# Altium PCB pcb_v1-HSM213-001-SPC.PcbDoc
Units mil, origin at the board's own origin, x right, y up, seen from the top; angles counter-clockwise.
Board outline 4020 x 2120 mil, 2 copper layers (Top Layer, Bottom Layer); 27 components, 27 nets, 117 pads, 9 vias.
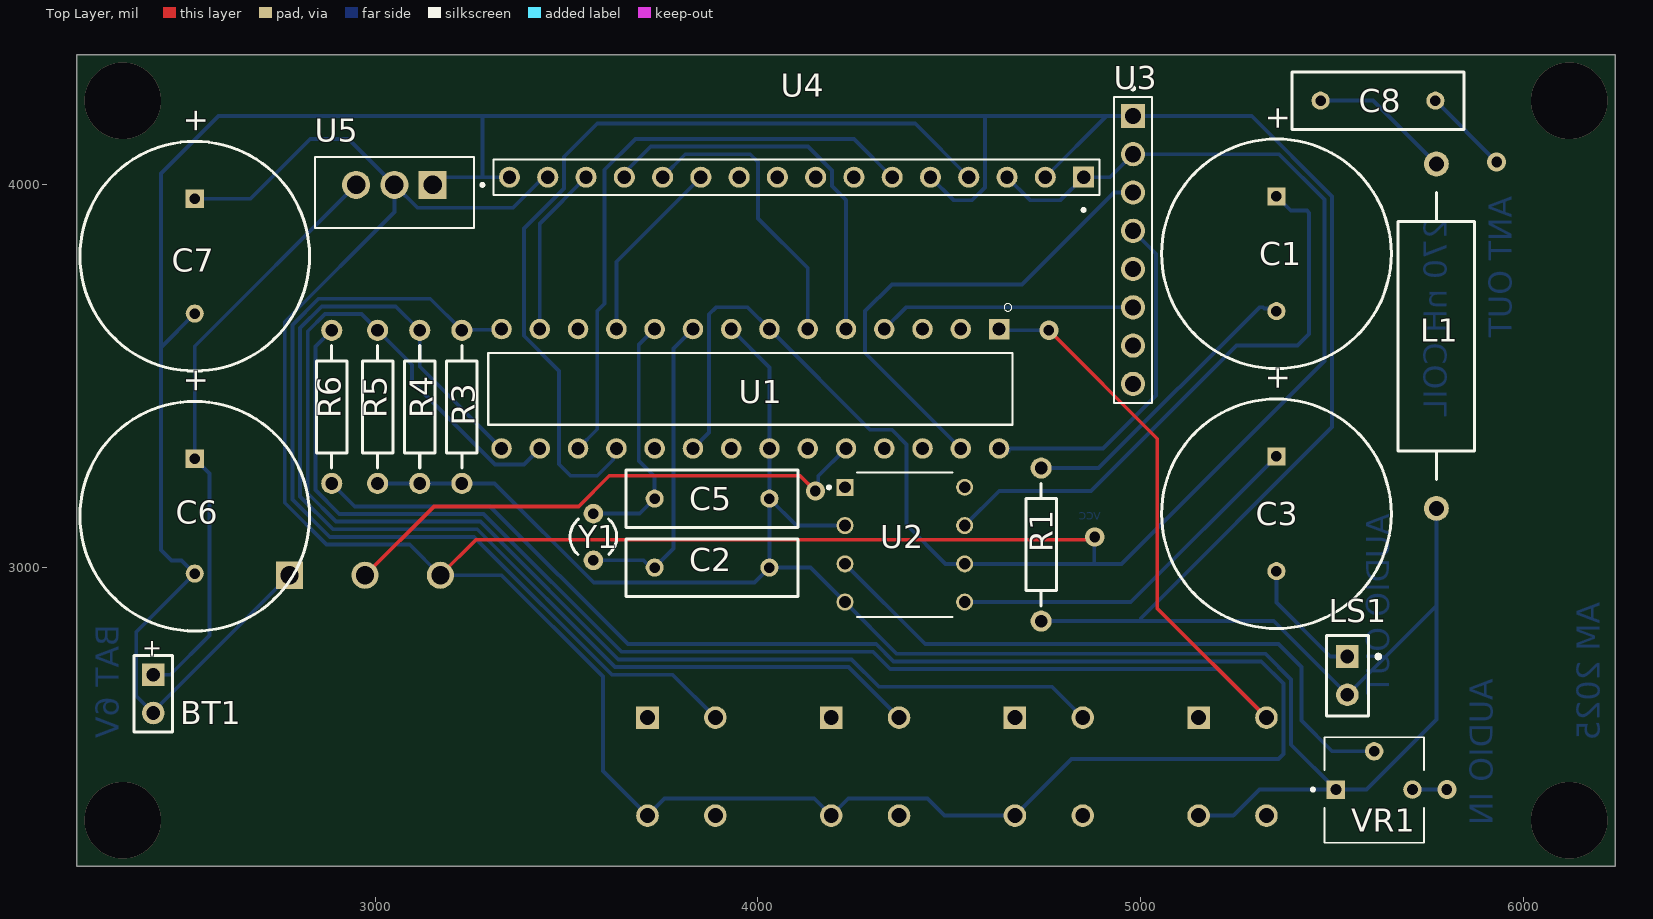
[diagram p0: Top Layer view]
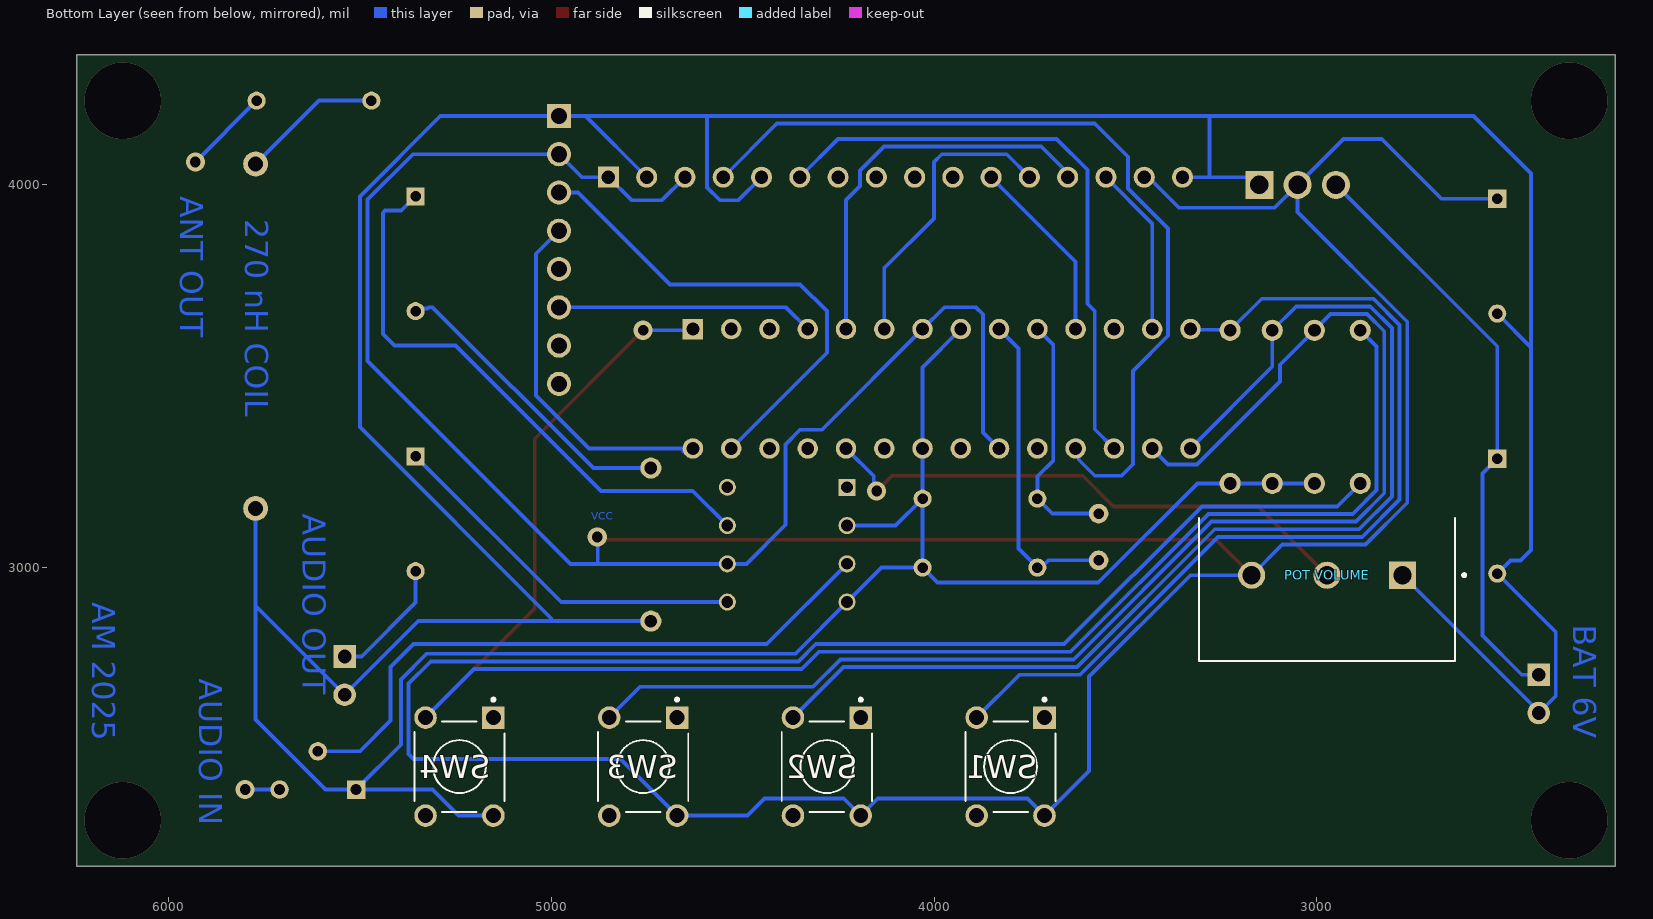
[diagram p1: Bottom Layer view, seen from below]
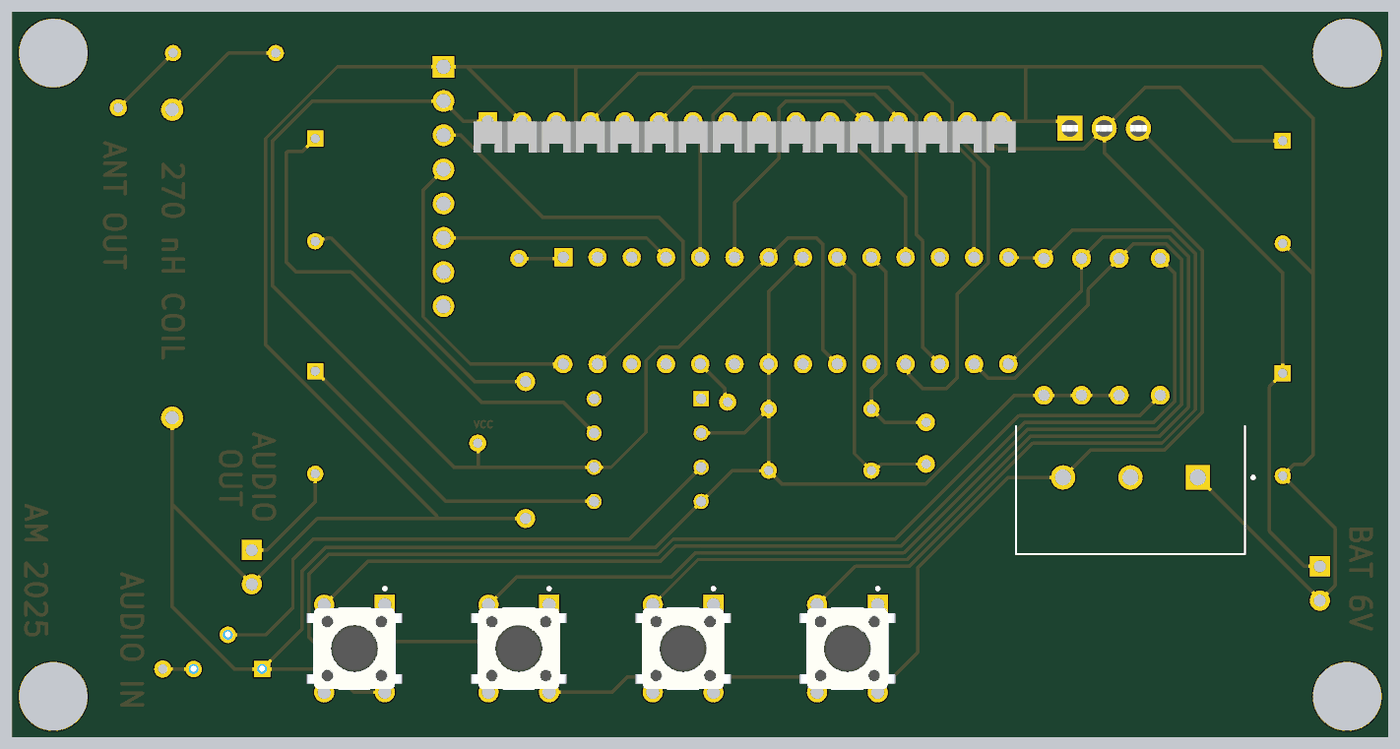
[diagram p2: 3D render of the assembled board from below, using the file's embedded part models]

## Layer stack, top to bottom
Top Solder: solder mask 0.4, Solder Resist, Dk 3.5
Top Layer: signal copper 1.4
Dielectric 1: dielectric 12.6, FR-4, Dk 4.8
Bottom Layer: signal copper 1.4
Bottom Solder: solder mask 0.4, Solder Resist, Dk 3.5

## Board outline
2220,2220 6240,2220 6240,4340 2220,4340

## Design rules (kind name [scope] priority, off if disabled: settings)
Clearance [All] p1: gap=10 ignorepadtopadclearanceinfootprint=FALSE
HoleSize [All] p1: absolutevalues=TRUE maxlimit=200 minlimit=1 maxpercent=80.000 minpercent=20.000
PolygonConnect [All] p1: connectstyle=Relief reliefconductorwidth=10 reliefentries=4 polygonreliefangle="90 Angle" airgapwidth=10
RoomDefinition Piirikaavio [InComponentClass('Piirikaavio')] p1: confinementstyle=ConfineIn formatcopy=TRUE lockcomponents=FALSE outline 2210,2220 6240,2220 6240,4340 2210,4340
RoutingVias [All] p1: holewidth=28 width=50 viastyle="Through Hole" minholewidth=28 minwidth=50 maxholewidth=28 maxwidth=50
SolderMaskExpansion [All] p1: expansion=4 istentingtop=FALSE
Width [All] p1: maxlimit=10 minlimit=10 preferedwidth=10
29 further rules are at their usual default settings.

## Components (designator, comment, footprint, x,y, rotation, side; value= is the part's Value field where it differs from the comment)
BT1 "Battery 6V" BAT-2 2420,2670 r270 top
C1 "Cap Pol1" RB7.6-15 5354.77,3820 r90 top value=0.1µF
C2 "Cap" RAD-0.3 3880,3000 r180 top value=22pF
C3 "Cap Pol1" RB7.6-15 5354.77,3140.64 r90 top value=1000µF
C5 "Cap" RAD-0.3 3880,3180 r180 top value=22pF
C6 "Cap Pol1" RB7.6-15 2528.37,3134.34 r90 top value=10µF
C7 "Cap Pol1" RB7.6-15 2528.37,3813.7 r90 top value=10µF
C8 "Cap" RAD-0.3 5620,4220 r180 top value=100pF
L1 "Inductor Iron" AXIAL-0.9 5772.66,3604.57 r270 top value="270 nH"
LS1 "Speaker" PIN2 5540,2767.63 r270 top
"POT VOLUME" "PTN16-A20120K1B1" POT_PTN16-A20120K1B1 2776.3,2980 r0 bottom
R1 "Res2" AXIAL-0.4 4740,3060 r90 top value=10
R3 "Res2" AXIAL-0.4 3226.25,3420 r270 top value=10k
R4 "Res2" AXIAL-0.4 3116.25,3420 r270 top value=10k
R5 "Res2" AXIAL-0.4 3006.25,3420 r270 top value=10k
R6 "Res2" AXIAL-0.4 2886.25,3420 r270 top value=10k
SW1 "1825910-6" SW_1825910-6-4 3800,2480 r270 bottom
SW2 "1825910-6" SW_1825910-6-4 4280,2480 r270 bottom
SW3 "1825910-6" SW_1825910-6-4 4760,2480 r270 bottom
SW4 "1825910-6" SW_1825910-6-4 5240,2480 r270 bottom
U1 "ATMEGA328P-PU" DIP794W46P254L2967H457Q28B 3980,3467.2 r270 top
U2 "LM386N-4/NOPB" DIP794W45P254L959H508Q8 4383.7,3059.75 r0 top
U3 "SI4703 Evaluation board" HARWIN_M20-9730846 4980,3830 r270 top
U4 "16x2 LCD-display" TE_6-146276-6 4100.76,4020 r180 top
U5 "LM1117T-3.3/NOPB" TO254P1054X470X1955-3 3050,4000 r180 top
VR1 "3362P-1-252LF" TRIM_3362P-1-252LF 5610,2420 r0 top
Y1 "8 MHz" R38 3570,3080 r180 top

## Footprints (in the part's own frame and the unit in brackets; to place one, negate y for a bottom-side part, rotate by r counter-clockwise, add the part's x,y. Pads: shape width x height; smd on the part's side, far side on the other; paste and mask are expansions set on the pad)
AXIAL-0.4 [mm] "Axial Device, Thru-Hole; 2 Leads; 0.4 in Pin Spacing"
  round 1.4 hole 0.85: 1(-5.08,0) 2(5.08,0)
  silkscreen extent -4.06,-1.02 4.06,1.02
AXIAL-0.9 [mm] "Axial Device, Thru-Hole; 2 Leads; 0.9 in Pin Spacing"
  round 1.65 hole 1: 1(-11.43,0) 2(11.43,0)
  silkscreen extent -9.53,-2.54 9.53,2.54
BAT-2 [mm] "Battery; 2 Leads"
  rect 1.5x1.5 hole 0.9: 1(-1.27,0)
  round 1.5 hole 0.9: 2(1.27,0)
  silkscreen extent -2.54,-1.27 2.54,1.27
DIP794W45P254L959H508Q8 [mm]
  rect 1.13x1.13 hole 0.78: 1(-3.97,3.81)
  round 1.13 hole 0.78: 2(-3.97,1.27) 3(-3.97,-1.27) 4(-3.97,-3.81) 5(3.97,-3.81) 6(3.97,-1.27) 7(3.97,1.27) 8(3.97,3.81)
  silkscreen extent -5.13,-4.79 3.17,4.79
DIP794W46P254L2967H457Q28B [mm]
  rect 1.358x1.358 hole 0.85: 1(-3.96,16.51)
  round 1.358 hole 0.85: 2(-3.96,13.97) 3(-3.96,11.43) 4(-3.96,8.89) 5(-3.96,6.35) 6(-3.96,3.81) 7(-3.96,1.27) 8(-3.96,-1.27) 9(-3.96,-3.81) 10(-3.96,-6.35) 11(-3.96,-8.89) 12(-3.96,-11.43) 13(-3.96,-13.97) 14(-3.96,-16.51) 15(3.96,-16.51) 16(3.96,-13.97) 17(3.96,-11.43) 18(3.96,-8.89) 19(3.96,-6.35) 20(3.96,-3.81) 21(3.96,-1.27) 22(3.96,1.27) 23(3.96,3.81) 24(3.96,6.35) 25(3.96,8.89) 26(3.96,11.43) 27(3.96,13.97) 28(3.96,16.51)
  silkscreen extent -5.65,-17.4 2.38,17.4
HARWIN_M20-9730846 [mm]
  rect 1.605x1.605 / inner round 1.605 / far side rect 1.605x1.605 hole 1.07: 1(-8.89,0)
  round 1.605 hole 1.07: 2(-6.35,0) 3(-3.81,0) 4(-1.27,0) 5(1.27,0) 6(3.81,0) 7(6.35,0) 8(8.89,0)
  silkscreen extent -10.82,-1.27 10.16,1.27
PIN2 [mm] "Photosensitive Diode; 2 Leads"
  rect 1.5x1.5 hole 0.9: 1(0,0)
  round 1.5 hole 0.9: 2(2.54,0)
  silkscreen extent -1.4,-1.4 3.94,2.18
POT_PTN16-A20120K1B1 [mm]
  rect 1.8x1.8 / inner round 1.8 / far side rect 1.8x1.8 hole 1.2: 1(0,0)
  round 1.8 hole 1.2: 2(5,0) 3(10,0)
  silkscreen extent -4.2,-3.81 13.5,5.69
R38 [mm] "Crystal, Thru-Hole; 2 Leads; Body 3.1 x 8.2 mm (Dia.xH)"
  round 1.3 hole 0.7: 1(0,1.55) 2(0,-1.55)
  silkscreen extent -1.55,-1.19 1.55,1.17
RAD-0.3 [mm] "Radial Cap, Thru-Hole; 2 Leads; 0.3 in Pin Spacing"
  round 1.2 hole 0.7: 1(-3.81,0) 2(3.81,0)
  silkscreen extent -5.71,-1.91 5.71,1.91
RB7.6-15 [mm] "Polarized Capacitor (Radial); 2 Leads"
  rect 1.2x1.2 hole 0.7: 1(3.81,0)
  round 1.2 hole 0.7: 2(-3.81,0)
  silkscreen extent -7.62,-7.62 7.62,7.62
SW_1825910-6-4 [mm]
  rect 1.498x1.498 / inner round 1.498 / far side rect 1.498x1.498 hole 0.99: 1(-3.25,2.25)
  round 1.498 hole 0.99: 2(3.25,2.25) 3(-3.25,-2.25) 4(3.25,-2.25)
  silkscreen extent -4.54,-3 3,3, body extent -3,-3.9 3,3.9, height 5.01
TE_6-146276-6 [mm]
  rect 1.398x1.398 hole 0.89: 1(-19.05,0)
  round 1.398 hole 0.89: 2(-16.51,0) 3(-13.97,0) 4(-11.43,0) 5(-8.89,0) 6(-6.35,0) 7(-3.81,0) 8(-1.27,0) 9(1.27,0) 10(3.81,0) 11(6.35,0) 12(8.89,0) 13(11.43,0) 14(13.97,0) 15(16.51,0) 16(19.05,0)
  silkscreen extent -20.12,-1.17 20.12,2.27, body extent -20.12,-8.08 20.12,5.46, height 1.17
TO254P1054X470X1955-3 [mm]
  rect 1.86x1.86 / inner round 1.86 / far side rect 1.86x1.86 hole 1.24: 1(-2.54,0)
  round 1.86 hole 1.24: 2(0,0) 3(2.54,0)
  silkscreen extent -5.94,-1.84 5.27,2.86, body extent -5.08,-1.49 5.08,2.71, height 22.86
TRIM_3362P-1-252LF [mil]
  rect 48.11x48.11 hole 28.11: 1(-100,0)
  round 48.11 hole 28.11: 2(0,100) 3(100,0)
  silkscreen extent -164,-139 130,137, body extent -130,-138 130,138, height 192

## Part data
BT1: library part Battery, "Multicell Battery", LatestRevisionDate=17-Jul-2002, LatestRevisionNote="Re-released for DXP Platform.", PackageDescription="Battery; 2 Leads", PackageReference=BAT-2, Published=24-Mar-1999, Publisher="Altium Limited"
C1 C3 C6 C7: "Polarized Capacitor (Radial)", LatestRevisionDate=17-Jul-2002, LatestRevisionNote="Re-released for DXP Platform.", PackageDescription="Polarized Capacitor (Radial); 2 Leads", PackageReference=RB7.6-15, Published=8-Jun-2000, Publisher="Altium Limited"
C2 C5 C8: "Capacitor", LatestRevisionDate=17-Jul-2002, LatestRevisionNote="Re-released for DXP Platform.", PackageDescription="Radial Cap, Thru-Hole; 2 Leads; 0.3 in Pin Spacing", PackageReference=RAD-0.3, Published=8-Jun-2000, Publisher="Altium Limited"
L1: "Magnetic-Core Inductor", LatestRevisionDate=17-Jul-2002, LatestRevisionNote="Re-released for DXP Platform.", PackageDescription="Axial Device, Thru-Hole; 2 Leads; 0.9 in Pin Spacing", PackageReference=AXIAL-0.9, Published=24-Mar-1999, Publisher="Altium Limited"
LS1: "Loudspeaker", LatestRevisionDate=17-Jul-2002, LatestRevisionNote="Re-released for DXP Platform.", PackageReference=PIN2, Published=24-Mar-1999, Publisher="Altium Limited"
"POT VOLUME": "16.5 mm, Horizontal, Linear, 20 kÎ©, Through Hole, Knurled Shaft Single Section Rotary Potentiometer", Package=None, Check_prices=https://www.snapeda.com/parts/PTN16-A20120K1B1/CUI+Devices/view-part/?ref=eda, CUI_purchase_URL=https://www.cuidevices.com/product/motion-and-control/potentiometers/rotary-potentiometers/ptn16-a20120k1b1?utm_source=snapeda.com&utm_medium=referral&utm_campaign=snapedaBOM, MF="CUI Devices", MP=PTN16-A20120K1B1, SnapEDA_Link=https://www.snapeda.com/parts/PTN16-A20120K1B1/CUI+Devices/view-part/?ref=snap
R1 R3 R4 R5 R6: "Resistor", LatestRevisionDate=17-Jul-2002, LatestRevisionNote="Re-released for DXP Platform.", PackageDescription="Axial Device, Thru-Hole; 2 Leads; 0.4 in Pin Spacing", PackageReference=AXIAL-0.4, Published=8-Jun-2000, Publisher="Altium Limited"
SW1 SW2 SW3 SW4: "Switch Push Button OFF (ON) SPST Round Button 0.05A 24VDC Momentary Contact PC Pins Thru-Hole", Package=None, Check_prices=https://www.snapeda.com/parts/1825910-6/TE+Connectivity+ALCOSWITCH+Switches/view-part/?ref=eda, Digi-Key_Part_Number=450-1650-ND, MF="TE Connectivity", MP=1825910-6, Purchase-URL=https://pricing.snapeda.com/search/part/1825910-6/?ref=eda, SnapEDA_Link=https://www.snapeda.com/parts/1825910-6/TE+Connectivity+ALCOSWITCH+Switches/view-part/?ref=snap
U1: "ATmega Series 20 MHz 32 KB Flash 2 KB SRAM 8-Bit Microcontroller - DIP-28", Package=None, Availability=Unavailable, MP=ATMEGA328P-PU, Price=None
U2: Package=None, Availability=Unavailable, MP=LM386N-4/NOPB, Price=None
U3: library part M20-9730846, Package=None, Availability=Unavailable, MF=Harwin, MP=M20-9730846, Price=None
U4: library part 6-146276-6, "16 MODII HDR SRST B/A .100CL", Package=None, Availability=Warning, Centerline_Pitch="2.54 mm[.1 in]", Check_prices=https://www.snapeda.com/parts/6-146276-6/TE%20Connectivity/view-part/1438677/?ref=eda, EU_RoHS_Compliance=Compliant, MF="TE Connectivity", MP=6-146276-6, Number_of_Positions=16, Price=None, Product_Type=Connector, Purchase-URL=https://pricing.snapeda.com/search/part/6-146276-6/?ref=eda, SnapEDA_Link=https://www.snapeda.com/parts/6-146276-6/TE%20Connectivity/view-part/1438677/?ref=snap
U5: "800-mA 15-V linear voltage regulator", Package="TO-220-3 Texas Instruments", Availability="In Stock", Check_prices=https://www.snapeda.com/parts/LM1117T-3.3/NOPB/Texas+Instruments/view-part/?ref=eda, MF="Texas Instruments", MP=LM1117T-3.3/NOPB, Price=None, Purchase-URL=https://pricing.snapeda.com/search/part/LM1117T-3.3/NOPB/?ref=eda, SnapEDA_Link=https://www.snapeda.com/parts/LM1117T-3.3/NOPB/Texas+Instruments/view-part/?ref=snap
VR1: "2.5 kOhms 0.5W, 1/2W PC Pins Through Hole Trimmer Potentiometer Cermet 1 Turn Top Adjustment", Package="3362P-1 Bourns Inc.", Availability=Warning, Check_prices=https://www.snapeda.com/parts/3362P-1-252LF/Bourns/view-part/1439689/?ref=eda, MF=Bourns, MP=3362P-1-252LF, Price=None, Purchase-URL=https://pricing.snapeda.com/search/part/3362P-1-252LF/?ref=eda, SnapEDA_Link=https://www.snapeda.com/parts/3362P-1-252LF/Bourns/view-part/1439689/?ref=snap
Y1: library part XTAL, "Crystal Oscillator", LatestRevisionDate=17-Jul-2002, LatestRevisionNote="Re-released for DXP Platform.", PackageDescription="Crystal, Thru-Hole; 2 Leads; Body 3.1 x 8.2 mm (Dia.xH)", PackageReference=R38, Published=8-Jun-2000, Publisher="Altium Limited"

## Via types
v1: diameter 50, hole 28, Top Layer to Bottom Layer, 5 vias
v2: diameter 200, hole 200, Top Layer to Bottom Layer, 4 vias

## Nets (pads, with @x,y where several pads share a name; then routed paths per layer and width w, separated by ;. In a path a pad name is that pad's centre, name@x,y a point inside that pad or via, vN(x,y) a via of type N, cw(c..) or ccw(c..) an arc to the next point about the centre after c; other vN are vias at no path point)
A1: "POT VOLUME.2" U1.24 | length 1448.7
  Top Layer w10: 2973.15,2976.85 2973.15,2980 3153.15,3160 3531.57,3160 3611.57,3240 4110,3240 v1(4150,3200)
  Bottom Layer w10: v1(4150,3200) 4157.65,3207.65 4157.65,3238.95 U1.24
ANTENNA: C8.1 | length 226.3
  Bottom Layer w10: C8.1 v1(5930,4060)
AUDIO: VR1.3 | length 90
  Bottom Layer w10: VR1.3 v1(5800,2420)
BTN1: R3.1 SW1.3 U1.14 | length 2407.6
  Bottom Layer w10: U1.14 3328.44,3621.56 3227.8,3621.56 R3.1 3143.69,3702.56 2852.05,3702.56 2783.69,3634.2 2783.69,3177.52 2881.21,3080 3258.28,3080 3618.28,2720 3776.54,2720 SW1.3
BTN2: R4.1 SW2.3 U1.15 | length 3003.5
  Bottom Layer w10: U1.15 3116.25,3525.05 R4.1 3053.69,3682.56 2860.34,3682.56 2803.69,3625.91 2803.69,3185.8 2889.49,3100 3266.57,3100 3626.57,2740 4236.54,2740 SW2.3
BTN3: R5.1 SW3.3 U1.16 | length 3522
  Bottom Layer w10: U1.16 3388.27,3269.57 3312.71,3269.57 3096.25,3486.03 3096.25,3530 R5.1 2963.69,3662.56 2868.62,3662.56 2823.69,3617.63 2823.69,3194.09 2897.78,3120 3274.85,3120 3634.85,2760 4244.82,2760 4316.16,2688.66 4767.87,2688.66 SW3.3
BTN4: R6.1 SW4.3 U1.1 | length 4545.2
  Top Layer w10: v1(4760,3620) 5043.43,3336.57 5043.43,2893.1 SW4.3
  Bottom Layer w10: R6.1 2843.69,3577.44 2843.69,3202.37 2906.06,3140 3283.14,3140 3643.14,2780 4300.59,2780 4345.65,2734.94 5201.6,2734.94 SW4.3 ; U1.1 4633.11,3620 v1(4760,3620)
D4: U1.11 U4.11 | length 488.3
  Bottom Layer w10: U1.11 3630,3799.24 U4.11
D5: U1.6 U4.12 | length 773.6
  Bottom Layer w10: U4.12 3750.76,4020.76 3810,4080 3980,4080 4000,4060 4000,3912.44 4130,3782.44 U1.6
D6: U1.5 U4.13 | length 1037.5
  Bottom Layer w10: U4.13 3650.76,4030.76 3720,4100 4130.89,4100 4193.28,4037.61 4193.28,3996.72 4230,3960 U1.5
D7: U1.13 U4.14 | length 446.9
  Bottom Layer w10: U1.13 3430,3899.24 U4.14
E: U1.17 U4.6 | length 1583
  Bottom Layer w10: U1.17 3580,3361.3 3580,3670 3599.3,3689.3 3599.3,4039.3 3680,4120 4250.76,4120 U4.6
GND: "POT VOLUME.1" BT1.2 C2.1 C5.1 C6.2 C7.2 L1.2 LS1.2 R1.1 R3.2 R4.2 R5.2 SW4.2 U1.8 U1.22 U2.2 U2.4 U3.1 U4.2 U4.5 U4.16 U5.1 VR1.1 | length 14012.8
  Bottom Layer w10: C7.2 2440,3575.34 ; 2776.3,2980 2420,2623.7 BT1.2 2375.47,2664.53 2375.47,2831.45 C6.2 2494.04,3018.66 2467.2,3018.66 2440,3045.86 2440,3575.34 ; R5.2 R4.2 R3.2 3311.57,3220 3570.79,2960.79 3990.79,2960.79 C2.1 ; U5.1 3170,4020 3280,4020 ; U4.16 3280,4020 ; U1.8 4030,3523.11 U1.22 C5.1 ; U2.2 4100.25,3109.75 C5.1 ; U4.5@4450,4020.76 U4.5 4510.76,3960 4560,3960 4593.28,3993.28 4593.28,4176.72 4590,4180 ; R1.1 5000,2860 ; U4.2 4910.76,4180 ; SW4.2 5242.05,2352.05 5310,2420 VR1.1 ; L1.2 5772.66,2900.29 ; 2440,3575.34 2440,4030 2590,4180 3280,4180 ; 3280,4020 3280,4180 ; 3280,4180 4590,4180 ; C2.1 4137.16,3000 U2.4 4362.22,2774.94 5325.69,2774.94 5393.07,2707.55 5393.07,2536.93 VR1.1 ; C2.1 C5.1 ; 4590,4180 4910.76,4180 ; 4910.76,4180 U3.1 5290,4180 5500,3970 5500,3367.41 5000,2867.41 5000,2860 ; 5000,2860 5347.63,2860 LS1.2 5772.66,2900.29 ; VR1.1 5590,2420 5772.66,2602.66 5772.66,2900.29
NetBT1_1: BT1.1 C6.1 U5.3 | length 1557.6
  Bottom Layer w10: BT1.1 2464.53,2720 2566.99,2822.46 2566.99,3245.72 C6.1 2528.37,3578.37 U5.3
NetC1_1: C1.1 U2.7 | length 1527.2
  Bottom Layer w10: U2.7 4630.25,3200 4870,3200 5250,3580 5410,3580 5440,3610 5440,3926.9 5434.14,3932.76 5392.01,3932.76 C1.1
NetC1_2: C1.2 R1.2 | length 793.3
  Bottom Layer w10: R1.2 4890,3260 5310,3680 5320,3680 5322.87,3677.13 5347.65,3677.13 C1.2 C1.2@5355.09,3669.68
NetC2_2: C2.2 U1.9 Y1.1 | length 832.4
  Bottom Layer w10: Y1.1 3700.95,3018.98 3719.92,3000 C2.2 3779.41,3049.41 3779.41,3572.52 U1.9
NetC3_1: C3.1 U2.5 | length 972.5
  Bottom Layer w10: U2.5 4973.89,2909.75 C3.1
NetC3_2: C3.2 LS1.1 | length 325.8
  Bottom Layer w10: C3.2 5354.77,2908.33 5495.47,2767.63 LS1.1
NetC5_2: C5.2 U1.10 Y1.2 | length 653.8
  Bottom Layer w10: Y1.2 3691.02,3141.02 C5.2 3730,3238.47 3688.27,3280.2 3688.27,3581.38 U1.10
NetC8_2: C8.2 L1.1 | length 371.2
  Bottom Layer w10: C8.2 5607.23,4220 L1.1
NetU2_3: U2.3 VR1.2 | length 1667.5
  Bottom Layer w10: U2.3 4437.16,2800 5360,2800 5420,2740 5420,2600 5500,2520 VR1.2
RS: U1.18 U4.4 | length 2240.6
  Bottom Layer w10: U1.18 3621.68,3302.98 3621.68,3281.68 3580,3240 3510,3240 3480,3270 3480,3514.09 3388.27,3605.82 3388.27,3885.79 3493.28,3990.8 3493.28,4073.28 3580,4160 4410.76,4160 U4.4
RST: U1.4 U3.6 | length 673.6
  Bottom Layer w10: U1.4 4386.89,3680 U3.6
SCL: U1.28 U3.4 | length 950.4
  Bottom Layer w10: U1.28@4654.61,3302.98 4638.32,3302.98 U1.28 4901.3,3311.3 5040,3450 5040,3820 U3.4
SDA: U1.27 U3.3 | length 1290.7
  Bottom Layer w10: U1.27 4280,3561.3 4280,3670 4350,3740 4690,3740 4930,3980 U3.3
VCC: "POT VOLUME.3" C7.1 R6.2 SW1.2 SW2.2 SW3.2 U1.7 U1.20 U2.6 U3.2 U4.1 U4.3 U4.15 U5.2 | length 13965.6
  Top Layer w10: 3170,2980 3262.51,3072.51 4872.51,3072.51 v1(4880,3080)
  Bottom Layer w10: C7.1 2673.7,3963.7 2830,4120 2930,4120 U5.2 ; R6.2 2946.25,3160 3300,3160 3660,2800 4308.87,2800 4353.93,2754.94 5315.06,2754.94 5373.07,2696.93 5373.07,2513.07 5360,2500 4819.37,2500 SW3.2 4487.62,2352.05 4443.13,2396.54 4235.91,2396.54 SW2.2 4146.93,2396.54 3755.91,2396.54 SW1.2 3595,2468.46 3595,2715 3330,2980 3170,2980 3090,3060 2872.93,3060 2763.69,3169.23 2763.69,3642.48 3050,3928.79 U5.2 ; U4.15@3450.76,4020.76 U4.15 3440,4020 3360,3940 3110,3940 U5.2 ; U1.20 3871.73,3353.03 3871.73,3661.73 3890,3680 3973.11,3680 U1.7 4293.11,3360 4350,3360 4388.27,3321.73 4388.27,3111.73 4490.25,3009.75 U2.6 4878.59,3009.75 ; U4.3 4710.76,3960 4790.76,3960 U4.1 4920,4020 U3.2 5361.72,4080 5480,3961.72 5480,3540 4949.75,3009.75 4878.59,3009.75 ; v1(4880,3080) 4878.59,3078.59 4878.59,3009.75
pads on no net: SW1.1 SW1.4 SW2.1 SW2.4 SW3.1 SW3.4 SW4.1 SW4.4 U1.2 U1.3 U1.12 U1.19 U1.21 U1.23 U1.25 U1.26 U2.1 U2.8 U3.5 U3.7 U3.8 U4.7 U4.8 U4.9 U4.10
copper on no net:
  other v2: 2340,2340 6120,2340 2340,4220 6120,4220

## Other copper
Bottom Layer:
  text "ANT OUT" at 5970,3970 h60 r90
  text "270 nH COIL" at 5800,3910 h60 r90
  text "AUDIO OUT" at 5650,3140 h60 r90
  text "VCC" at 4895,3125 h20
  text "AM 2025" at 6200,2910 h60 r90
  text "BAT 6V" at 2330,2850 h60 r90
  text "AUDIO IN" at 5920,2709.86 h60 r90

## Text inside footprints (layer, text, board x,y; h text height)
BT1: Top Overlay "+" at 2397.28,2814.49 h45.28 r270
C1: Top Overlay "+" at 5383.78,4140.15 h59.06 r90
C3: Top Overlay "+" at 5383.78,3460.79 h59.06 r90
C6: Top Overlay "+" at 2557.37,3454.49 h59.06 r90
C7: Top Overlay "+" at 2557.37,4133.86 h59.06 r90